# Altium PCB MainFuckingBoard.PcbDoc
Units mm, origin at the board's own origin, x right, y up, seen from the top; angles counter-clockwise.
Board outline 100 x 100 mm, 2 copper layers (Top Layer, Bottom Layer); 21 components, 15 nets, 123 pads, 1 vias.
Unrouted connection lines stored in the file: 50.
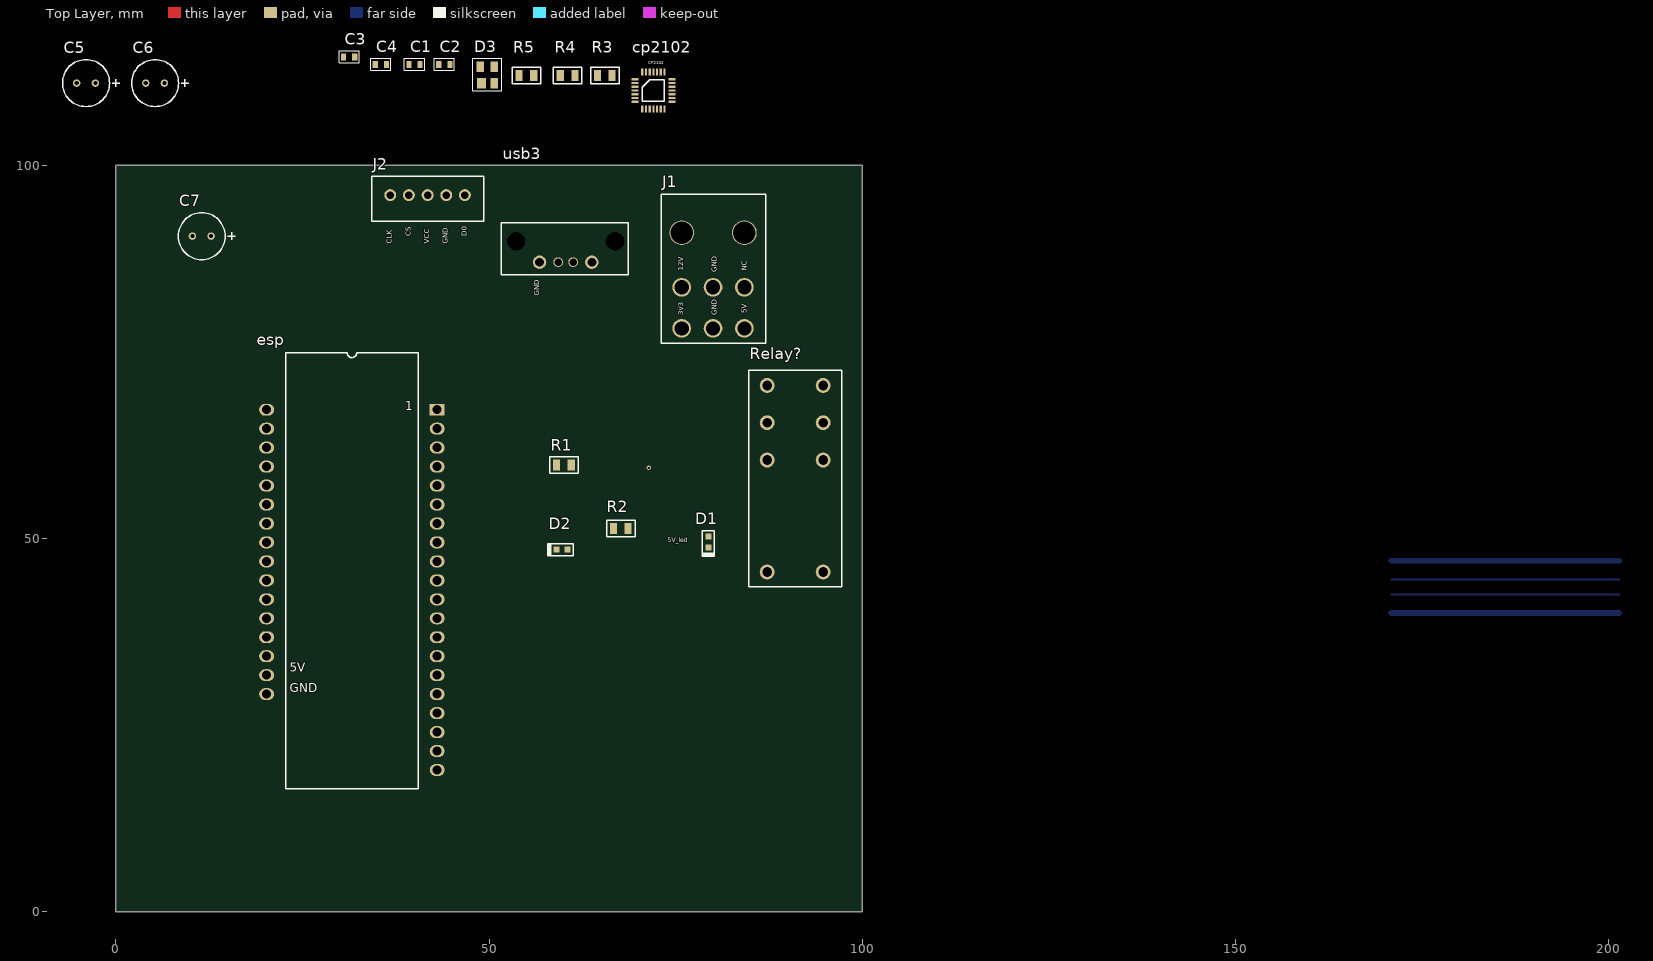
[diagram p0: Top Layer view]
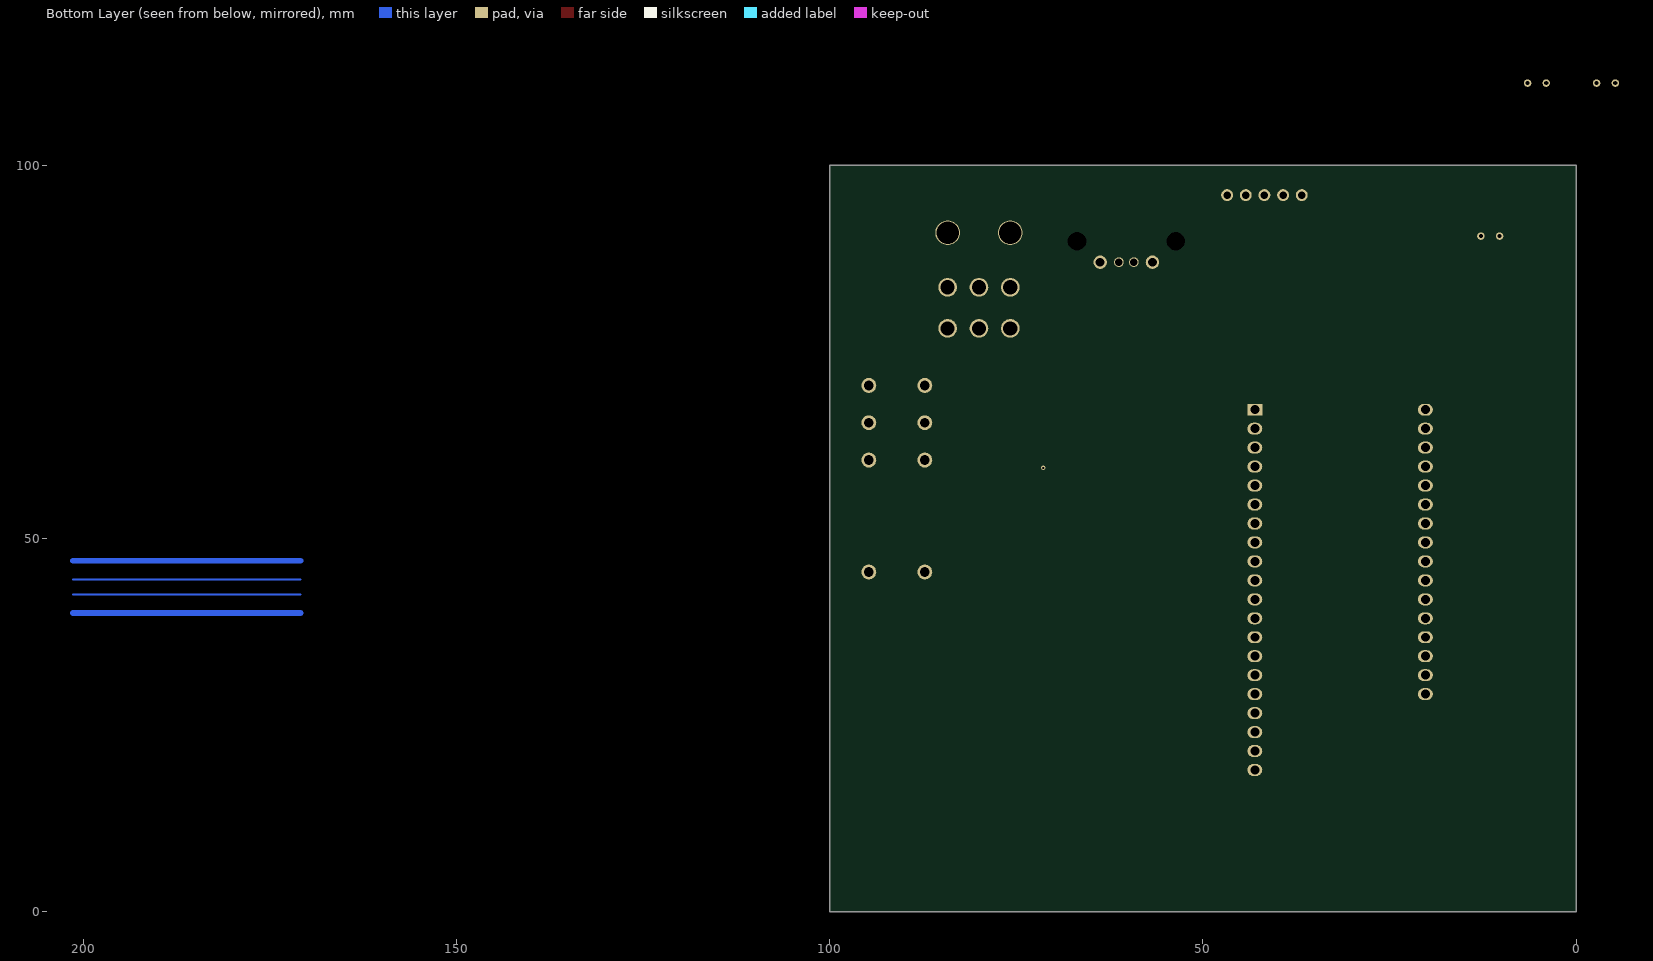
[diagram p1: Bottom Layer view, seen from below]

## Layer stack, top to bottom
Top Solder: solder mask 0.0102, Solder Resist, Dk 3.5
Top Layer: signal copper 0.0356
Dielectric 1: dielectric 0.32, FR-4, Dk 4.8
Bottom Layer: signal copper 0.0356
Bottom Solder: solder mask 0.0102, Solder Resist, Dk 3.5

## Board outline
0,0 100,0 100,100 0,100

## Design rules (kind name [scope] priority, off if disabled: settings)
Clearance [All] p1: gap=0.2 ignorepadtopadclearanceinfootprint=FALSE
PolygonConnect [All] p1: connectstyle=Relief reliefconductorwidth=0.254 reliefentries=4 polygonreliefangle="90 Angle" airgapwidth=0.254
RoutingVias [All] p1: holewidth=0.3 width=0.6 viastyle="Through Hole" minholewidth=0.3 minwidth=0.6 maxholewidth=0.5 maxwidth=1.27
SolderMaskExpansion [All] p1: expansion=0.102
Width [All] p1: maxlimit=1.27 minlimit=0.254 preferedwidth=0.254
30 further rules are at their usual default settings.

## Components (designator, comment, footprint, x,y, rotation, side; value= is the part's Value field where it differs from the comment)
C1 "capacitor0603" CAPACITOR0603 40,113.5 r0 top
C2 "capacitor0603" CAPACITOR0603 44,113.5 r0 top
C3 "capacitor0603" CAPACITOR0603 31.25,114.5 r0 top
C4 "capacitor0603" CAPACITOR0603 35.5,113.5 r0 top
C5 "EEU-FM0J331" 2.5mmCapacitor -4,111 r0 top
C6 "EEU-FM0J331" 2.5mmCapacitor 5.25,111 r0 top
C7 "EEU-FM0J331" 2.5mmCapacitor 11.5,90.5 r0 top
cp2102 "CP2102N" CP2102N_QFN28 72,110 r0 top
D1 "Led" LED0603 79.37,49.53 r90 top
D2 "Led" LED0603 59.75,48.5 r0 top
D3 "SP0503BAHTG" "SP0503BAHTG - SOT143-4" 49,111 r0 top
esp "processor" ESP_32_socket 43.042,67.242 r0 top
J1 "6pins" "4.2MM 6PIN POWER CONNECTOR" 75.79,83.64 r90 top
J2 "abs_encoder" "xh 2.54 5 pin" 36.75,96 r90 top
R1 "360R" R0805 60.025,59.82 r180 top
R2 "360R" R0805 67.645,51.32 r0 top
R3 "22.1k" R0805 65.5,112 r0 top
R4 "47.5k" R0805 60.5,112 r0 top
R5 "1Kohms" R0805 55,112 r0 top
Relay? "LM1H-12D" "Relay LM1H-12D" 91,58 r0 top
usb3 "usb_A_horizontal" HORIZONTAL_USB_A_MALE_SOCKET 56.75,87 r90 top

## Footprints (in the part's own frame and the unit in brackets; to place one, negate y for a bottom-side part, rotate by r counter-clockwise, add the part's x,y. Pads: shape width x height; smd on the part's side, far side on the other; paste and mask are expansions set on the pad)
2.5mmCapacitor [mm]
  round 1 hole 0.55: 1(-1.25,0) 2(1.25,0)
  silkscreen extent -3.15,-3.15 4.5,3.15, body extent -3.15,-3.15 3.15,3.15, height 11
"4.2MM 6PIN POWER CONNECTOR" [mm]
  round 2.5 hole 1.9: 1(-5.5,0) 2(0,-4.2) 3(-5.5,-4.2) 4(-5.5,-8.4) 5(0,-8.4) 6(0,0)
  round 3.3 hole 3 unplated: 98(7.3,-8.4) 99(7.3,0)
  silkscreen extent -7.5,-11.25 12.5,2.75, body extent -6.22,-22.57 13.72,3, height 11.4
CAPACITOR0603 [mm]
  rect 0.7x0.9 smd: 1(-0.75,0) 2(0.75,0)
  silkscreen extent -1.35,-0.8 1.35,0.8, body extent -0.8,-0.4 0.8,0.4, height 0.9
CP2102N_QFN28 [mm]
  rect 0.95x0.3 smd: 1(-2.475,1.5) 2(-2.475,1) 3(-2.475,0.5) 4(-2.475,0) 5(-2.475,-0.5) 6(-2.475,-1) 7(-2.475,-1.5) 15(2.475,-1.5) 16(2.475,-1) 17(2.475,-0.5) 18(2.475,0) 19(2.475,0.5) 20(2.475,1) 21(2.475,1.5)
  rect 0.3x0.95 smd: 8(-1.5,-2.475) 9(-1,-2.475) 10(-0.5,-2.475) 11(0,-2.475) 12(0.5,-2.475) 13(1,-2.475) 14(1.5,-2.475) 22(1.5,2.475) 23(1,2.475) 24(0.5,2.475) 25(0,2.475) 26(-0.5,2.475) 27(-1,2.475) 28(-1.5,2.475)
  silkscreen extent -1.46,-1.46 1.46,1.46, body extent -2.5,-2.51 2.52,2.51, height 0.75
ESP_32_socket [mm]
  rect 2x1.6 hole 1.2: 1(0,0)
  oval 2x1.6 hole 1.2: 2(0,-2.54) 3(0,-5.08) 4(0,-7.62) 5(0,-10.16) 6(0,-12.7) 7(0,-15.24) 8(0,-17.78) 9(0,-20.32) 10(0,-22.86) 11(0,-25.4) 12(0,-27.94) 13(0,-30.48) 14(0,-33.02) 15(0,-35.56) 16(0,-38.1) 17(0,-40.64) 18(0,-43.18) 19(0,-45.72) 20(0,-48.26) 21(-22.86,0) 22(-22.86,-2.54) 23(-22.86,-5.08) 24(-22.86,-7.62) 25(-22.86,-10.16) 26(-22.86,-12.7) 27(-22.86,-15.24) 28(-22.86,-17.78) 29(-22.86,-20.32) 30(-22.86,-22.86) 31(-22.86,-25.4) 32(-22.86,-27.94) 33(-22.86,-30.48) 34(-22.86,-33.02) 35(-22.86,-35.56) 36(-22.86,-38.1)
  silkscreen extent -20.32,-50.8 -2.54,7.62
HORIZONTAL_USB_A_MALE_SOCKET [mm]
  round 1.8 hole 1.2: 1(0,0) 4(0,-7)
  round 1.3 hole 1: 2(0,-2.5) 3(0,-4.5)
  round 0 hole 2.5: 5(2.8,-10.1) 8(2.8,3.1)
  silkscreen extent -1.7,-11.9 5.3,5.1, body extent -1,-11.62 13,4.62, height 7.67
LED0603 [mm]
  rect 0.8x0.8 smd: 1(-0.75,0) 2(0.75,0)
  silkscreen extent -1.9,-0.8 1.5,0.8, body extent -0.83,-0.37 0.83,0.36, height 0.68
R0805 [mm]
  rect 0.95x1.45 smd: 1(-0.975,0) 2(0.975,0)
  silkscreen extent -1.9,-1.1 1.9,1.1, body extent -1,-0.62 1,0.63, height 0.46
"Relay LM1H-12D" [mm]
  round 2 hole 1.3: 1(-3.75,-12.5) 2(3.75,-12.5) 3(-3.75,7.5) 3(3.75,7.5) 4(-3.75,12.5) 4(3.75,12.5) 5(-3.75,2.5) 5(3.75,2.5)
  silkscreen extent -6.25,-14.5 6.25,14.5, body extent -6.25,-14.75 6.25,14.75, height 20.9
"SP0503BAHTG - SOT143-4" [mm]
  rect 1.2x1.4 smd: 1(0,0)
  rect 1x1.4 smd: 2(1.7,0) 3(-0.2,2.2) 4(1.7,2.2)
  silkscreen extent -1.2,-1 2.7,3.3, body extent -0.75,-0.15 2.25,2.35, height 1.11
"xh 2.54 5 pin" [mm]
  round 1.6 hole 1: 1(0,-10) 2(0,-7.5) 3(0,-5) 4(0,-2.5) 5(0,0)
  silkscreen extent -3.5,-12.5 2.5,2.5, body extent -3.38,-12.45 2.38,2.45, height 7

## Part data
C1 C2 C3 C4: "Cap Ceramic 4.7uF 6.3V X5R 20% Pad SMD 0402 85C T/R", Capacitance=4.7uF, Dielectric=X5R, Manufacturer 1=Murata, Manufacturer Part Number 1=GRM155R60J475ME87J, Supplier Part Number 1=490-18211-1-ND, Tolerance=20%, Voltage Rating (DC)=6.3V, Category="Ceramic Capacitors", ComponentLink1Description=https://search.murata.co.jp/Ceramy/image/img/A01X/G101/ENG/GRM155R60J475ME87-01.pdf?src-supplier=Digi-Key, ComponentLink1URL=https://search.murata.co.jp/Ceramy/image/img/A01X/G101/ENG/GRM155R60J475ME87-01.pdf?src-supplier=Digi-Key, Length=1mm, Pricing 1="1=0.16000, 10=0.11100, 50=0.06280, 100=0.05210, 500=0.03654, 1000=0.03025, 2500=0.02815, 5000=0.02575 (USD)", RoHS=No, Stock 1=206568, Supplier 1=Digi-Key, Thickness=500um, Width=500um
C5 C6 C7: "Cap 330 uF;  Tol 20%;  Vol-Rtg 6.3 VDC;  Radial;  6.3x11.2;  Bulk", Capacitance=330uF, Case/Package=Radial, Dielectric Material=Aluminium, ESR (Equivalent Series Resistance)=130mR, Leakage Current=10nA, Manufacturer 1=Panasonic, Max Operating Temperature=105°C, Min Operating Temperature=-40°C, Package Quantity=200, Ripple Current=455mA, Supplier Part Number 1=P12918-ND, Tolerance=20%, Voltage=6.3V, Category="Aluminum Electrolytic Capacitors", ComponentLink1Description=https://datasheet.ciiva.com/11778/0900766b805f3abe-11778876.pdf?src-supplier=RSComponents, ComponentLink1URL=https://datasheet.ciiva.com/11778/0900766b805f3abe-11778876.pdf?src-supplier=RSComponents, ComponentLink2Description=https://datasheet.ciiva.com/92/aba0000ce108-92408.pdf?src-supplier=Digi-Key, ComponentLink2URL=https://datasheet.ciiva.com/92/aba0000ce108-92408.pdf?src-supplier=Digi-Key, ComponentLink3Description=https://datasheet.ciiva.com/30086/aba0000ce108-30086253.pdf?src-supplier=Onlinecomponents.com, ComponentLink3URL=https://datasheet.ciiva.com/30086/aba0000ce108-30086253.pdf?src-supplier=Onlinecomponents.com, ComponentLink4Description=https://datasheet.ciiva.com/16432/aba0000ce108-16432949.pdf?src-supplier=Future+Electronics, ComponentLink4URL=https://datasheet.ciiva.com/16432/aba0000ce108-16432949.pdf?src-supplier=Future+Electronics, ComponentLink5Description=https://datasheet.ciiva.com/46441/26036-46441017.pdf?src-supplier=Element14, ComponentLink5URL=https://datasheet.ciiva.com/46441/26036-46441017.pdf?src-supplier=Element14, ComponentLink6Description=https://datasheet.ciiva.com/14608/70068540-14608622.pdf?src-supplier=Allied+Electronics, ComponentLink6URL=https://datasheet.ciiva.com/14608/70068540-14608622.pdf?src-supplier=Allied+Electronics, Diameter=6mm, Height=11.2mm, Height - Seated (Max)=0.5inch, Impedance=130mR, Lead Diameter=0.5mm, Lead Free="Lead Free", Lead Length=17mm, Lead Pitch=2.5mm, Length=11.2mm, Life (Hours)=2000Hour, Manufacturer Part Number 1=EEU-FM0J331, Mount="Through Hole,PCB", Number of Pins=2, Outside Diameter=6mm, Packaging=Bulk, Pricing 1="1=0.30000, 10=0.21200, 50=0.14800, 100=0.12690, 500=0.09518, 1000=0.08037, 2500=0.07614, 5000=0.07191 (USD)", Radiation Hardening=No, REACH SVHC="No SVHC", Ripple Current (AC)=455mA, RoHS=Yes, Stock 1=15455, Supplier 1=Digi-Key, Termination=Radial, Voltage Rating=6.3V, Voltage Rating (DC)=6.3V
cp2102: library part CP2102N-A02-GQFN28R, "Full Speed USB to UART Bridge USB 2.0 3.3V T/R Automotive 28-Pin QFN EP", Manufacturer 1="Silicon Labs", Supplier Part Number 1=336-5890-1-ND, Manufacturer Part Number 1=CP2102N-A02-GQFN28R, Pricing 1="1=1.40000, 25=1.35160, 100=1.29950 (USD)", RoHS=No, Stock 1=1682, Supplier 1=Digi-Key
D1 D2: library part LTST-C190TBKT, "LED BLUE CLEAR CHIP SMD", Case/Package=0603, Case Code (Metric)=1608, Color=Blue, Forward Current=20mA, Forward Voltage=3.8V, Lens Color=Colorless, Manufacturer 1="Vishay Lite-On", Max Operating Temperature=80°C, Min Operating Temperature=-20°C, Package Quantity=1, Power Dissipation=76mW, Reverse Voltage=5V, Case Code (Imperial)=0603, Category=LEDs, ComponentLink1Description=https://datasheet.ciiva.com/16353/lite-on20ltst-c190tbkt-16353409.pdf?src-supplier=Future+Electronics, ComponentLink1URL=https://datasheet.ciiva.com/16353/lite-on20ltst-c190tbkt-16353409.pdf?src-supplier=Future+Electronics, ComponentLink2Description=https://datasheet.ciiva.com/15117/getdatasheetpartid-131310-15117667.pdf?src-supplier=Verical, ComponentLink2URL=https://datasheet.ciiva.com/15117/getdatasheetpartid-131310-15117667.pdf?src-supplier=Verical, ComponentLink3Description=https://datasheet.ciiva.com/2110/ltst-c190tbkt-2110473.pdf?src-supplier=Digi-Key, ComponentLink3URL=https://datasheet.ciiva.com/2110/ltst-c190tbkt-2110473.pdf?src-supplier=Digi-Key, ComponentLink4Description=https://datasheet.ciiva.com/12400/lite-on-ltst-c190tbkt-187381-12400873.pdf?src-supplier=Mouser, ComponentLink4URL=https://datasheet.ciiva.com/12400/lite-on-ltst-c190tbkt-187381-12400873.pdf?src-supplier=Mouser, ComponentLink5Description=https://datasheet.ciiva.com/11774/0900766b80dc02ab-11774378.pdf?src-supplier=RSComponents, ComponentLink5URL=https://datasheet.ciiva.com/11774/0900766b80dc02ab-11774378.pdf?src-supplier=RSComponents, ComponentLink6Description=https://datasheet.ciiva.com/26913/ltst-c190tbkt-26913716.pdf?src-supplier=IIIC, ComponentLink6URL=https://datasheet.ciiva.com/26913/ltst-c190tbkt-26913716.pdf?src-supplier=IIIC, ComponentLink7Description=https://datasheet.ciiva.com/2110/s-110-ltst-c190tbkt0630-2110475.pdf?src-supplier=Digi-Key, ComponentLink7URL=https://datasheet.ciiva.com/2110/s-110-ltst-c190tbkt0630-2110475.pdf?src-supplier=Digi-Key, ComponentLink8Description=¾ï?, ComponentLink8URL=https://www.digikey.tw/product-detail/zh/lite-on-inc/LTST-C191KFKT/160-1445-1-ND/386832, Depth=0.8mm, Dominant Wavelength=475nm, Height=0.8mm, Illumination Color=Blue, Lead Free="Lead Free", Length=1.6mm, Lens Style=Diffused,Colorless,Clear,Rectangular, Lens Transparency=Clear, Luminous Intensity=180mcd, Manufacturer Part Number 1=LTST-C190TBKT, Mount="Surface Mount", Number of Elements=1, Number of LEDs=1, Number of Pins=2, Packaging="Tape and Reel", Pricing 1="1=0.50000, 10=0.35600, 100=0.15840, 500=0.11088, 1000=0.09108 (USD)", Radiation Hardening=No, RoHS=Yes, Stock 1=76203, Supplier 1=Digi-Key, Test Current=20mA, Viewing Angle=130°, Wavelength=468nm, Width=0.8mm
D3: "ESD Suppressor TVS 5.5V 4-Pin(3+Tab) SOT-143 T/R", Breakdown Voltage=5.5V, Capacitance=30pF, Case/Package=SOT-143, Clamping Voltage=8.5V, Leakage Current=100nA, Manufacturer 1=Littelfuse, Max Operating Temperature=85°C, Max Power Dissipation=225mW, Min Operating Temperature=-40°C, Power Line Protection=No, Resistor Type=Zener, Supplier Part Number 1=F2715CT-ND, Voltage Rating (DC)=5V, Category=Diodes, ComponentLink1Description=https://datasheet.ciiva.com/15143/getdatasheetpartid-116020-15143550.pdf?src-supplier=Verical, ComponentLink1URL=https://datasheet.ciiva.com/15143/getdatasheetpartid-116020-15143550.pdf?src-supplier=Verical, ComponentLink2Description=https://datasheet.ciiva.com/332/sp05xxba-332550.pdf?src-supplier=Digi-Key, ComponentLink2URL=https://datasheet.ciiva.com/332/sp05xxba-332550.pdf?src-supplier=Digi-Key, ComponentLink3Description=https://datasheet.ciiva.com/8062/littefuse-spa-sp050x-8062422.pdf?src-supplier=Element14, ComponentLink3URL=https://datasheet.ciiva.com/8062/littefuse-spa-sp050x-8062422.pdf?src-supplier=Element14, ComponentLink4Description=https://datasheet.ciiva.com/22697/1911798-22697942.pdf?src-supplier=Element14, ComponentLink4URL=https://datasheet.ciiva.com/22697/1911798-22697942.pdf?src-supplier=Element14, ComponentLink5Description=https://datasheet.ciiva.com/332/sp05xxba-332551.pdf?src-supplier=Digi-Key, ComponentLink5URL=https://datasheet.ciiva.com/332/sp05xxba-332551.pdf?src-supplier=Digi-Key, ComponentLink6Description=https://datasheet.ciiva.com/16449/sp05xxba-16449463.pdf?src-supplier=Future+Electronics, ComponentLink6URL=https://datasheet.ciiva.com/16449/sp05xxba-16449463.pdf?src-supplier=Future+Electronics, ComponentLink7Description=https://datasheet.ciiva.com/332/sp05xxba-332552.pdf?src-supplier=Digi-Key, ComponentLink7URL=https://datasheet.ciiva.com/332/sp05xxba-332552.pdf?src-supplier=Digi-Key, ComponentLink8Description=https://datasheet.ciiva.com/4509/sp05x-leadfree-4509162.pdf?src-supplier=Mouser, ComponentLink8URL=https://datasheet.ciiva.com/4509/sp05x-leadfree-4509162.pdf?src-supplier=Mouser, ComponentLink9Description=https://datasheet.ciiva.com/7650/526672-7650894.pdf?src-supplier=Element14, ComponentLink9URL=https://datasheet.ciiva.com/7650/526672-7650894.pdf?src-supplier=Element14, Depth=1.4mm, Diode Type=Avalanche, Direction=Unidirectional, Element Configuration="Common Anode", ESD Protection=Yes, Height=1.05mm, Lead Free="Lead Free", Length=3.04mm, Manufacturer Part Number 1=SP0503BAHTG, Max Reverse Leakage Current=100nA, Mount="Surface Mount", Number of Channels=3, Number of Elements=3, Number of Pins=4, Number of Unidirectional Channels=3, Operating Supply Voltage=5.5V, Packaging="Tape and Reel", Peak Pulse Power=225mW, Polarity=Bidirectional,Unidirectional, Power Dissipation=225mW, Pricing 1="1=0.80000, 10=0.66000, 100=0.51120, 500=0.38340, 1000=0.30885 (USD)", Radiation Hardening=No, REACH SVHC="No SVHC", Reverse Standoff Voltage=5.5V, RoHS=Yes, Stock 1=63906, Supplier 1=Digi-Key, Termination=SMD/SMT, Width=1.4mm, Working Voltage=5.5V
esp: library part ESP_32_lolin
J1: library part "4.2mm 6pin module connector", "MiniFit Jr RA Hdr Assy LCP 6 w/press pgs", Current Rating=13A, Flammability Rating="UL94 V-0", Manufacturer 1=Molex, Manufacturer Part Number 1=50-36-2462, Max Operating Temperature=105°C, Min Operating Temperature=-40°C, Package Quantity=920, Supplier Part Number 1=WM14529-ND, Voltage Rating=600V, Category="Headers and Wire Housings", ComponentLink1Description=https://datasheet.ciiva.com/29142/050362462-sd-29142097.pdf?src-supplier=Digi-Key, ComponentLink1URL=https://datasheet.ciiva.com/29142/050362462-sd-29142097.pdf?src-supplier=Digi-Key, Contact Gender=Male, Contact Material=Brass, Contact Plating=Tin, ELV=Compliant, Housing Material=Polymer, Material=Brass, Mount="Through Hole", Number of Pins=6, Number of Positions=6, Number of Rows=2, Orientation="Right Angle", Packaging=Tray, Pitch=4.2mm, Pricing 1="1=1.09000, 10=0.96100, 100=0.82900, 500=0.67824, 1000=0.60288, 5000=0.52752, 10000=0.50114 (USD)", REACH SVHC="No SVHC", RoHS=Yes, Row Spacing=4.2mm, Stock 1=3080, Supplier 1=Digi-Key, Termination="Through Hole"
J2: library part Abs_encoder_pins, ComponentLink1Description=datasheet, ComponentLink1URL=http://www.jst-mfg.com/product/pdf/eng/eXH.pdf
R1 R2: library part CRCW0805360RFKEA, "Res Thick Film 0805 360 Ohm 1% 0.125W(1/8W) ±100ppm/C Molded SMD Automotive Paper T/R", Case/Package=0805, Case Code (Metric)=2012, Manufacturer 1=Vishay, Max Operating Temperature=155°C, Max Power Dissipation=125mW, Min Operating Temperature=-55°C, Package Quantity=10, Supplier Part Number 1=541-360CCT-ND, Temperature Coefficient=100ppm/°C, Tolerance=1%, Voltage Rating=150V, Case Code (Imperial)=0805, Category="Chip SMD Resistors", ComponentLink1Description=https://datasheet.ciiva.com/2467/dcrcwe3-2467773.pdf?src-supplier=Digi-Key, ComponentLink1URL=https://datasheet.ciiva.com/2467/dcrcwe3-2467773.pdf?src-supplier=Digi-Key, Composition="Thick Film", Contact Plating=Tin, Depth=1.25mm, Features="Automotive AEC-Q200", Height=0.45mm, Lead Free="Lead Free", Length=2mm, Manufacturer Part Number 1=CRCW0805360RFKEA, Military Standard=Not, Number of Pins=2, Number of Terminals=2, Number of Terminations=2, Packaging="Tape and Reel", Power Rating=125mW, Pricing 1="1=0.10000, 10=0.06000, 100=0.02450, 1000=0.01102, 2500=0.00957 (USD)", Radiation Hardening=No, REACH SVHC=Unknown, Resistance=360R, RoHS=Yes, Stock 1=25005, Supplier 1=Digi-Key, Termination=SMD/SMT, Voltage Rating (DC)=150V, Weight=0.000194oz, Width=0.049inch
R3 R4: library part resistor(CRCW0805360RFKEA, "Res Thick Film 0805 360 Ohm 1% 0.125W(1/8W) ±100ppm/C Molded SMD Automotive Paper T/R", Case/Package=0805, Case Code (Metric)=2012, Manufacturer 1=Vishay, Manufacturer Part Number 1=CRCW0805360RFKEA, Max Operating Temperature=155°C, Max Power Dissipation=125mW, Min Operating Temperature=-55°C, Package Quantity=10, Resistance=360R, Supplier Part Number 1=541-360CCT-ND, Temperature Coefficient=100ppm/°C, Tolerance=1%, Voltage Rating=150V, Case Code (Imperial)=0805, Category="Chip SMD Resistors", ComponentLink1Description=https://datasheet.ciiva.com/2467/dcrcwe3-2467773.pdf?src-supplier=Digi-Key, ComponentLink1URL=https://datasheet.ciiva.com/2467/dcrcwe3-2467773.pdf?src-supplier=Digi-Key, Composition="Thick Film", Contact Plating=Tin, Depth=1.25mm, Features="Automotive AEC-Q200", Height=0.45mm, Lead Free="Lead Free", Length=2mm, Military Standard=Not, Number of Pins=2, Number of Terminals=2, Number of Terminations=2, Packaging="Tape and Reel", Power Rating=125mW, Pricing 1="1=0.10000, 10=0.06000, 100=0.02450, 1000=0.01102, 2500=0.00957 (USD)", Radiation Hardening=No, REACH SVHC=Unknown, RoHS=Yes, Stock 1=25005, Supplier 1=Digi-Key, Termination=SMD/SMT, Voltage Rating (DC)=150V, Weight=0.000194oz, Width=0.049inch
R5: library part resistor(CRCW0805360RFKEA, Case/Package=0805, Case Code (Metric)=2012, Manufacturer 1=Vishay, Manufacturer Part Number 1=CRCW0805360RFKEA, Max Operating Temperature=155°C, Max Power Dissipation=125mW, Min Operating Temperature=-55°C, Package Quantity=10, Resistance=360R, Supplier Part Number 1=541-360CCT-ND, Temperature Coefficient=100ppm/°C, Tolerance=1%, Voltage Rating=150V, Case Code (Imperial)=0805, Category="Chip SMD Resistors", ComponentLink1Description=https://datasheet.ciiva.com/2467/dcrcwe3-2467773.pdf?src-supplier=Digi-Key, ComponentLink1URL=https://datasheet.ciiva.com/2467/dcrcwe3-2467773.pdf?src-supplier=Digi-Key, Composition="Thick Film", Contact Plating=Tin, Depth=1.25mm, Features="Automotive AEC-Q200", Height=0.45mm, Lead Free="Lead Free", Length=2mm, Military Standard=Not, Number of Pins=2, Number of Terminals=2, Number of Terminations=2, Packaging="Tape and Reel", Power Rating=125mW, Pricing 1="1=0.10000, 10=0.06000, 100=0.02450, 1000=0.01102, 2500=0.00957 (USD)", Radiation Hardening=No, REACH SVHC=Unknown, RoHS=Yes, Stock 1=25005, Supplier 1=Digi-Key, Termination=SMD/SMT, Voltage Rating (DC)=150V, Weight=0.000194oz, Width=0.049inch
usb3: "4 Position Single Port Socket Right Angle Type A Through Hole USB", Color=Black, Contact Current Rating=1A, Flammability Rating="UL94 V-0", Insulation Resistance=1GR, Manufacturer 1="TE Connectivity", Manufacturer Part Number 1=292303-1, Max Operating Temperature=185°C, Min Operating Temperature=-67°C, Package Quantity=30, Supplier Part Number 1=A31726-ND, Voltage Rating (AC)=30V, Approvals=UL, Category="Audio / Video Connectors", Circuit Application=Signal, ComponentLink1Description=https://datasheet.ciiva.com/851/eng-cd-292303-e9-851601.pdf?src-supplier=Farnell, ComponentLink1URL=https://datasheet.ciiva.com/851/eng-cd-292303-e9-851601.pdf?src-supplier=Farnell, ComponentLink2Description=https://datasheet.ciiva.com/1099/1653030-1099765.pdf?src-supplier=Newark, ComponentLink2URL=https://datasheet.ciiva.com/1099/1653030-1099765.pdf?src-supplier=Newark, ComponentLink3Description=https://datasheet.ciiva.com/1098/eng-cd-292303-e9-1098298.pdf?src-supplier=Element14, ComponentLink3URL=https://datasheet.ciiva.com/1098/eng-cd-292303-e9-1098298.pdf?src-supplier=Element14, ComponentLink4Description=https://datasheet.ciiva.com/11731/0900766b806d08c4-11731322.pdf?src-supplier=RSComponents, ComponentLink4URL=https://datasheet.ciiva.com/11731/0900766b806d08c4-11731322.pdf?src-supplier=RSComponents, ComponentLink5Description=https://datasheet.ciiva.com/14103/04270708-14103420.pdf?src-supplier=Distrelec, ComponentLink5URL=https://datasheet.ciiva.com/14103/04270708-14103420.pdf?src-supplier=Distrelec, ComponentLink6Description=https://datasheet.ciiva.com/19454/921651-19454494.pdf?src-supplier=Jameco, ComponentLink6URL=https://datasheet.ciiva.com/19454/921651-19454494.pdf?src-supplier=Jameco, ComponentLink7Description=https://datasheet.ciiva.com/16308/eng-cd-292303-e7-16308319.pdf?src-supplier=Future+Electronics, ComponentLink7URL=https://datasheet.ciiva.com/16308/eng-cd-292303-e7-16308319.pdf?src-supplier=Future+Electronics, ComponentLink8Description=https://datasheet.ciiva.com/3094/eng-ds-1-1773453-6-0908-3094357.pdf?src-supplier=Avnet, ComponentLink8URL=https://datasheet.ciiva.com/3094/eng-ds-1-1773453-6-0908-3094357.pdf?src-supplier=Avnet, ComponentLink9Description=https://datasheet.ciiva.com/16468/eng-ds-1-1773453-6-0908-16468232.pdf?src-supplier=Avnet+Asia, ComponentLink9URL=https://datasheet.ciiva.com/16468/eng-ds-1-1773453-6-0908-16468232.pdf?src-supplier=Avnet+Asia, ComponentLink10Description=https://datasheet.ciiva.com/851/eng-cd-292303-e9-851082.pdf?src-supplier=Digi-Key, ComponentLink10URL=https://datasheet.ciiva.com/851/eng-cd-292303-e9-851082.pdf?src-supplier=Digi-Key, ComponentLink11Description=https://datasheet.ciiva.com/8016/1653030-8016986.pdf?src-supplier=Element14, ComponentLink11URL=https://datasheet.ciiva.com/8016/1653030-8016986.pdf?src-supplier=Element14, ComponentLink12Description=https://datasheet.ciiva.com/14618/70041246-14618698.pdf?src-supplier=Allied+Electronics, ComponentLink12URL=https://datasheet.ciiva.com/14618/70041246-14618698.pdf?src-supplier=Allied+Electronics, ComponentLink13Description=https://datasheet.ciiva.com/25907/eng-ds-1-1773453-6-0908-25907515.pdf?src-supplier=Avnet+Europe, ComponentLink13URL=https://datasheet.ciiva.com/25907/eng-ds-1-1773453-6-0908-25907515.pdf?src-supplier=Avnet+Europe, ComponentLink14Description=https://datasheet.ciiva.com/30148/ddecontrolleractionsrchrtrvdocnm117734536doctypedsdoclan-30148862.pdf?src-supplier=Onlinecomponents.com, ComponentLink14URL=https://datasheet.ciiva.com/30148/ddecontrolleractionsrchrtrvdocnm117734536doctypedsdoclan-30148862.pdf?src-supplier=Onlinecomponents.com, Connector System=Cable-to-Board, Connector Type=Receptacle, Contact Material="Copper Alloy,Copper", Contact Plating=Gold, Current Rating=1A, Depth=14mm, Gender=Receptacle, Halogen Free="Halogen Free", Housing Color=Black, Housing Material=Thermoplastic, Length=14.63mm, Mount="Through Hole,Horizontal", Number of Contacts=4, Number of Ports=1, Number of Positions=4, Number of Terminals=4, Orientation="Right Angle", Packaging=Rail/Tube, PCB Thickness=0.062inch, Pitch=2.5mm, Plating=Bright,Tin, Plating Thickness=0.76um, Pricing 1="1=1.49000, 10=1.35400, 25=1.27160, 50=1.21620, 100=1.16100, 250=1.05040, 500=0.96748, 1000=0.82926, 2500=0.77398 (USD)", REACH SVHC="No SVHC", RoHS=Yes, Stock 1=16277, Supplier 1=Digi-Key, Tail Length=0.112inch, Termination="Through Hole", USB Standard="USB 2.0"

## Via types
v1: diameter 0.6, hole 0.3, Top Layer to Bottom Layer, 1 vias

## Nets (pads, with @x,y where several pads share a name; then routed paths per layer and width w, separated by ;. In a path a pad name is that pad's centre, name@x,y a point inside that pad or via, vN(x,y) a via of type N, cw(c..) or ccw(c..) an arc to the next point about the centre after c; other vN are vias at no path point)
+5V: C5.2 C6.2 C7.2 D1.2 J1.4 Relay?.4
+12V: J1.6 Relay?.1
DTR_IO0: cp2102.28 esp.17
GND: C1.1 C2.1 C3.1 C4.1 C5.1 C6.1 C7.1 cp2102.3 D3.1 esp.1 esp.7 esp.8 esp.18 esp.36 J1.2 J1.3 R1.1 R2.1 R4.1 Relay?.2 usb3.1
  other v1: 71.38,59.44
NetC3_2: C3.2 C4.2 cp2102.6 R5.1
Netcp2102_4: cp2102.4 D3.2 usb3.2
Netcp2102_5: cp2102.5 D3.3 usb3.3
Netcp2102_8: cp2102.8 R3.1 R4.2
Netcp2102_9: cp2102.9 R5.2
NetD1_1: D1.1 R2.2
NetD2_1: D2.1 R1.2
NetD2_2: D2.2 esp.4
Netesp_35: esp.35 Relay?.3
RTS_EN: cp2102.24 esp.22
USB_5V: C1.2 C2.2 cp2102.7 D3.4 R3.2 Relay?.5 usb3.4
pads on no net: cp2102.1 cp2102.2 cp2102.10 cp2102.11 cp2102.12 cp2102.13 cp2102.14 cp2102.15 cp2102.16 cp2102.17 cp2102.18 cp2102.19 cp2102.20 cp2102.21 cp2102.22 cp2102.23 cp2102.25 cp2102.26 cp2102.27 esp.2 esp.3 esp.5 esp.6 esp.9 esp.10 esp.11 esp.12 esp.13 esp.14 esp.15 esp.16 esp.19 esp.20 esp.21 esp.23 esp.24 esp.25 esp.26 esp.27 esp.28 esp.29 esp.30 esp.31 esp.32 esp.33 esp.34 J1.1 J1.5 J1.98 J1.99 J2.1 J2.2 J2.3 J2.4 J2.5 usb3.5 usb3.8
copper on no net: | length 121.9
  Bottom Layer w0.254: 170.88,42.5 201.36,42.5 ; 170.88,44.5 201.36,44.5
  Bottom Layer w0.762: 170.88,40 201.36,40 ; 170.88,47 201.36,47

## Silkscreen, mask and mechanical layers (free items; w line width, h text height)
Top Overlay:
  text "5V_led" at 73.92,49.28 h1

## Text inside footprints (layer, text, board x,y; h text height)
cp2102: Top Overlay "CP2102" at 71.325,113.4 h0.7
esp: Top Overlay "GND" at 23.292,28.992 h2.03; Top Overlay "5V" at 23.292,31.742 h2.03; Top Overlay "1" at 38.792,66.742 h2.03
J1: Top Overlay "3v3" at 76.29,79.89 h1.2 r90; Top Overlay "GND" at 80.79,85.64 h1.2 r90; Top Overlay "5V" at 84.79,80.14 h1.2 r90; Top Overlay "NC" at 84.79,85.89 h1.2 r90; Top Overlay "GND" at 80.79,79.89 h1.2 r90; Top Overlay "12V" at 76.29,85.89 h1.2 r90
J2: Top Overlay "VCC" at 42.25,89.5 h1.2 r90; Top Overlay "CLK" at 37.25,89.5 h1.2 r90; Top Overlay "CS" at 39.75,90.5 h1.2 r90; Top Overlay "D0" at 47.25,90.5 h1.2 r90; Top Overlay "GND" at 44.75,89.5 h1.2 r90
usb3: Top Overlay "GND" at 57,82.5 h1.2 r90